# EAGLE board Sistema de Irrigação 2.0 (EAGLE 9.7.0)

Size 154.01 x 147.12 mm. Coordinates in mm from the lower left corner, seen from the top.
Outline: 0,0 154.01,0 154.01,147.12 0,147.12 0,0
Copper layers (1*16): Top 0.035mm / dielectric 1.5mm / Bottom 0.035mm
Design rules "default": minimum track width 6mil, minimum drill 0.35mm, track to track 6mil, track to pad 6mil, pad to pad 6mil, via to via 6mil, smd to smd 6mil, copper to edge 40mil, drill to drill 6mil, minimum pad ring 10mil, minimum via ring 8mil, stop-mask expansion 4mil, vias tented up to drill 0mil, thermal gap 10mil

## Footprints (pad centres in the part's own frame; a part is rotated, then mirrored left to right if it is on the bottom)
LEDRD254W60D565H860B = drill 0.981 pad 1.581: 1 -1.27,0; 2 1.27,0
LEDRD254W60D565H860B_G = drill 0.981 pad 1.581: 1 -1.27,0; 2 1.27,0
LU-5-R = drill 0.8: 1 -6.35,-3.81; 5 3.81,-3.81; 6 6.35,-3.81; 7 6.35,3.81; 8 3.81,3.81; 12 -6.35,3.81
MOTOR = drill 1.118 pad 3.15 octagon: + 2.54,0; - -2.54,0
BATTERY-GENERIC = drill 1.118 pad 3.15 octagon: + 2.54,0; - -2.54,0
RESAD1016W63L850D250B = drill 0.83 pad 1.43: 1 -5.08,0; 2 5.08,0
SEN-13322 = drill 1.016 long: 1 -2.54,0; 2 0,0; 3 2.54,0
ARDUINO-UNO-R3-SHIELD = drill 1.016 pad 1.88: 3.3V 24.13,-2.54; 5V 24.13,0; A0 24.13,12.7; A1 24.13,15.24; A2 24.13,17.78; A3 24.13,20.32; A4 24.13,22.86; A5 24.13,25.4; AREF -24.13,-13.97; D2 -24.13,20.32; D3 -24.13,17.78; D4 -24.13,15.24; D5 -24.13,12.7; D6 -24.13,10.16; D7 -24.13,7.62; D8 -24.13,3.81; D9 -24.13,1.27; D10 -24.13,-1.27; D11 -24.13,-3.81; D12 -24.13,-6.35; D13 -24.13,-8.89; GND@0 24.13,2.54; GND@1 24.13,5.08; GND@2 -24.13,-11.43; IOREF 24.13,-7.62; NC 24.13,-10.16; RES 24.13,-5.08; RX -24.13,25.4; SCL -24.13,-19.05; SDA -24.13,-16.51; TX -24.13,22.86; VIN 24.13,7.62
LCD-I2C = drill 1.016 long: 1 -19.05,-5.08; 2 -19.05,-7.62; 3 -19.05,-10.16; 4 -19.05,-12.7

## Placement (x,y rotation side)
D1  RED  [LEDRD254W60D565H860B]  54.38,138.82 180 top
D2  GREEN  [LEDRD254W60D565H860B_G]  41.62,139.21 180 top
K1  RELAY-SPDT_LU-5-R  [LU-5-R]  108.17,113.7 180 top
M1  MOTOR_HDR  [MOTOR]  136.72,123.33 0 top
P1  BATTERYGENERIC  [BATTERY-GENERIC]  145.76,73.83 180 top
R1  330  [RESAD1016W63L850D250B]  53.11,133.74 90 top
R2  330  [RESAD1016W63L850D250B]  40.35,134.13 90 top
R3  1k  [RESAD1016W63L850D250B]  104.4,98.88 90 top
SEN1  SEN-13322  [SEN-13322]  121.66,42.42 0 top
U1  ARDUINO-UNO-R3-SHIELD  [ARDUINO-UNO-R3-SHIELD]  55.43,86.4 270 top
ULCD  LCD-16X2-I2CSUNFOUNDER-IIC  [LCD-I2C]  30.73,36.63 0 top

## Library data of the parts
D1 = Tinkercad; CATEGORY: Opto-Electronic; SUB-CATEGORY: LED; VALUE: LED_RED
D2 = Tinkercad; CATEGORY: Opto-Electronic; SUB-CATEGORY: LED; VALUE: LED_GREEN
K1 M1 P1 R1-R3 SEN1 U1 ULCD = Tinkercad

## Nets
D1_C: D1.2 R1.2
D2_C: D2.2 R2.2
M1_+: K1.6 M1.+
P1+: K1.12 P1.+
P1-: M1.- P1.-
R3_2: K1.8 R3.2
U1_5V: SEN1.1 U1.5V ULCD.2
U1_A0: SEN1.3 U1.A0
U1_A4: U1.A4 ULCD.3
U1_A5: U1.A5 ULCD.4
U1_D7: R3.1 U1.D7
U1_D8: D1.1 U1.D8
U1_D9: D2.1 U1.D9
U1_GND: K1.5 R1.1 R2.1 SEN1.2 U1.GND@0 U1.GND@1 U1.GND@2 ULCD.1

## Tracks (layer width: path | path; a pad name or v marks a point on that pad's centre or on a via)
D1_C  (1 unrouted)
D2_C  (1 unrouted)
M1_+  (1 unrouted)
P1+  (1 unrouted)
P1-  (1 unrouted)
R3_2  (1 unrouted)
U1_5V  (2 unrouted)
U1_A0  (1 unrouted)
U1_A4  (1 unrouted)
U1_A5  (1 unrouted)
U1_D7  (1 unrouted)
U1_D8  (1 unrouted)
U1_D9  (1 unrouted)
U1_GND  (7 unrouted)